# Altium PCB PCB1.PcbDoc
Units mm, origin at the board's own origin, x right, y up, seen from the top; angles counter-clockwise.
Board outline 40.39 x 68.48 mm, 2 copper layers (Top Layer, Bottom Layer); 30 components, 25 nets, 105 pads, 16 vias.
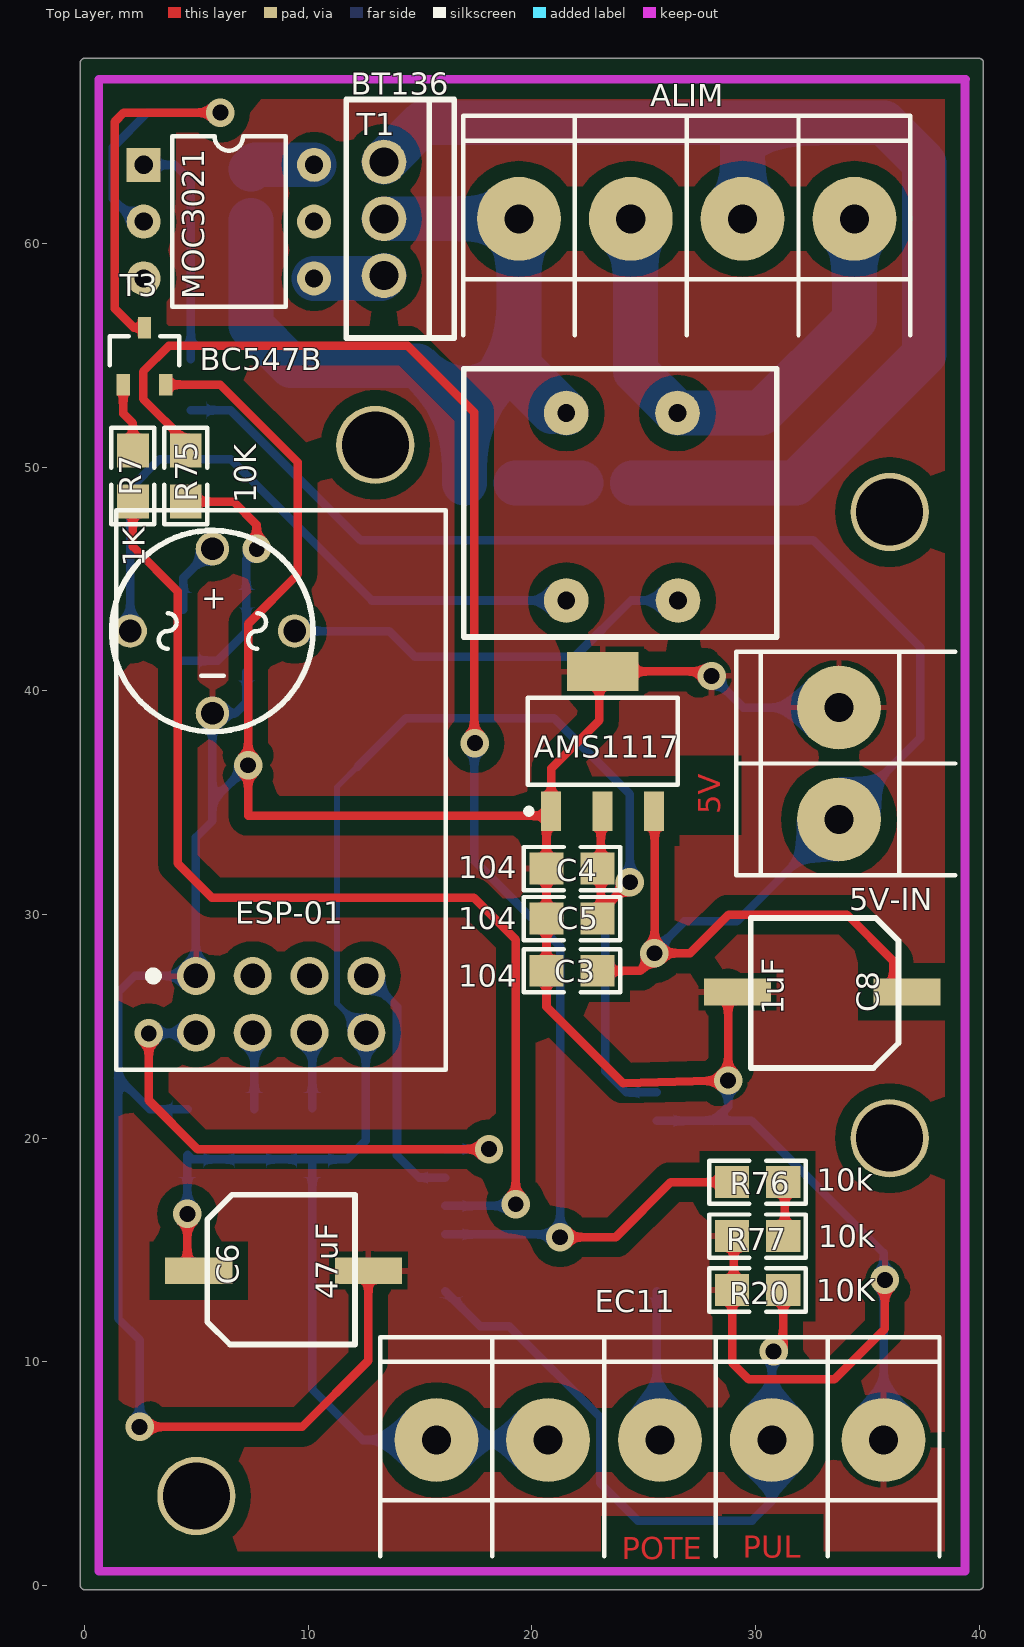
[diagram p0: Top Layer view]
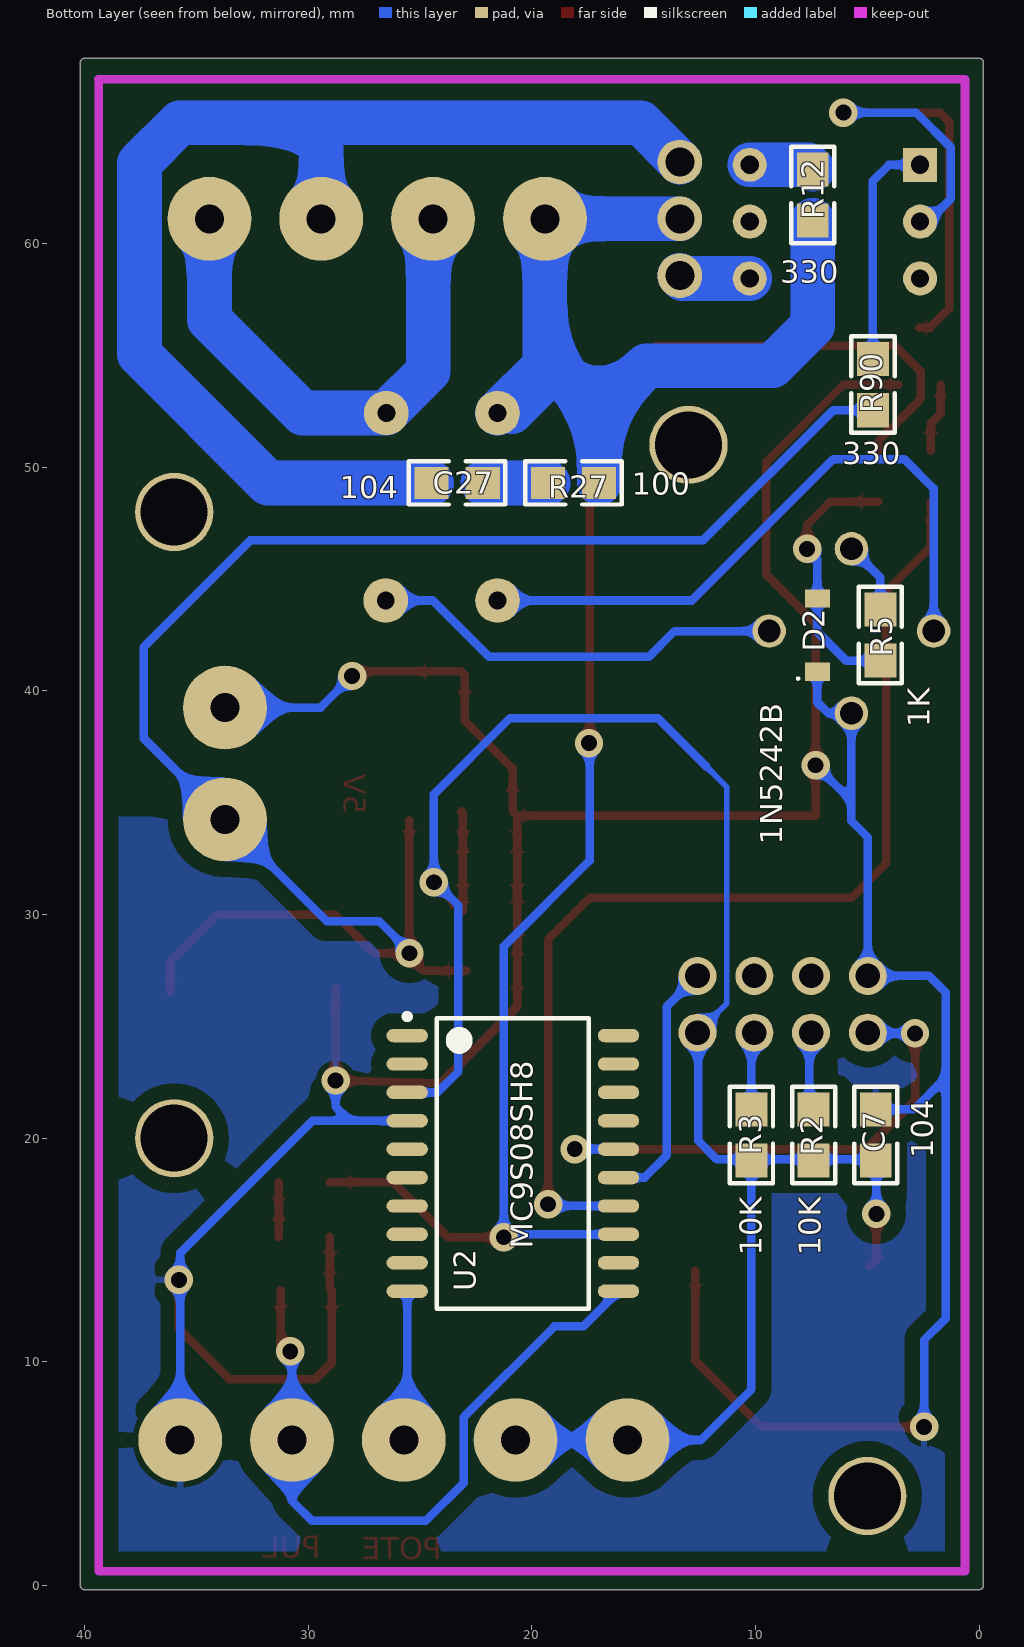
[diagram p1: Bottom Layer view, seen from below]

## Layer stack, top to bottom
Top Solder: solder mask 0.0102, Solder Resist, Dk 3.5
Top Layer: signal copper 0.0356
Dielectric 1: dielectric 0.32, FR-4, Dk 4.8
Bottom Layer: signal copper 0.0356
Bottom Solder: solder mask 0.0102, Solder Resist, Dk 3.5

## Board outline
-0.191,0 -0.191,68 cw(c0,68) -0.185,68.049 cw(c0,68.097) 0,68.288 40.005,68.288 cw(c40.005,68.097) 40.196,68.097 40.196,0 cw(c40.005,0) 40.005,-0.191 0,-0.191 cw(c0,0)

## Design rules (kind name [scope] priority, off if disabled: settings)
Clearance POLYGON [All vs InPolygon] p1: gap=0.7
Clearance [All] p2: gap=0.254
PolygonConnect [All] p1: connectstyle=Relief reliefconductorwidth=0.254 reliefentries=4 polygonreliefangle="90 Angle" airgapwidth=0.254
RoutingVias [All] p1: holewidth=0.711 width=1.27 viastyle="Through Hole" minholewidth=0.711 minwidth=1.27 maxholewidth=0.711 maxwidth=1.27
SolderMaskExpansion [All] p1: expansion=0.102
UnpouredPolygon [All] p1: allowunpoured=FALSE
Width [All] p1: maxlimit=2 minlimit=0.254 preferedwidth=0.381 minimp=50.000000 maximp=50.000000 favimp=50.000000
29 further rules are at their usual default settings.

## Classes and differential pairs
component class esq: C3 C4 C5 C6 C7 C8 C27 D2 R2 R3 R5 R7 R12 R20 R27 R75 R76 R77 R90 T1 T3 U2 ""

## Components (designator, comment, footprint, x,y, rotation, side; value= is the part's Value field where it differs from the comment)
* "TRAFO" "trafo chico" 23.952,51.41 r0 top
C3 "104" 0805 21.799,27.483 r180 top
C4 "104" 0805 21.799,29.82 r0 top
C5 "104" 0805 21.799,32.055 r180 top
C6 "47uF" CAP_SMD 8.788,14.072 r0 top
C7 "104" 0805 4.623,20.142 r90 bottom
C8 "1uF" CAP_SMD 33.096,26.543 r180 top
C27 "104" 0805 23.343,49.301 r0 bottom
D1 "" "PUENTE - W10M" 5.715,46.355 r0 top
D2 "1N5242B" Diodo 7.239,42.494 r90 bottom
J10 "5V-IN" BORNERA2 33.731,36.754 r0 top
J25 "EC11" BORNERA5 25.73,6.502 r270 top
J30 "ALIM" BORNERA4 26.924,61.112 r270 top
R2 "10K" 0805 7.404,20.142 r90 bottom
R3 "10K" 0805 10.185,20.142 r90 bottom
R5 "1K" 0805 4.42,42.494 r270 bottom
R7 "1K" 0805 2.159,49.606 r270 top
R12 "330" 0805 7.442,62.179 r90 bottom
R20 "10K" 0805 30.099,13.208 r0 top
R27 "100" 0805 18.136,49.301 r180 bottom
R75 "10K" 0805 4.521,49.606 r90 top
R76 "10k" 0805 30.099,18.034 r180 top
R77 "10k" 0805 30.099,15.621 r0 top
R90 "330" 0805 4.75,53.696 r90 bottom
T1 "BT136" BT136 13.386,61.112 r270 top
T3 "BC547B" SOT23 1.727,53.696 r0 top
U2 "MC9S08SH8" SH8 20.853,18.872 r180 bottom
U6 "ESP-01" ESP-01 4.978,24.714 r0 top
U27 "MOC3021" MOC3021 2.642,63.475 r0 top
U65 "AMS1117" AMS1117 23.165,37.744 r90 top

## Footprints (in the part's own frame and the unit in brackets; to place one, negate y for a bottom-side part, rotate by r counter-clockwise, add the part's x,y. Pads: shape width x height; smd on the part's side, far side on the other; paste and mask are expansions set on the pad)
0805 [mil] "Pasivo 0805"
  rect 60x56 smd: 1(-45,0) 2(45,0)
  silkscreen extent -85,-38 85,38, body extent -40,-25 39,25, height 15
AMS1117 [mm] "SOT223, 4-Leads, Body 6,50x7,00mm (avg), Pitch 2,30mm, IPC Medium Density"
  rect 1.75x0.9 smd: 1(-3.125,-2.3) 2(-3.125,2.3) 3(-3.125,0)
  rect 1.75x3.2 smd: 2(3.125,0)
  silkscreen extent -3.25,-3.35 1.95,3.42, body extent -3.48,-3.25 3.48,3.25, height 1.7
BORNERA2 [mm] "Bornera con Tornillos 5mm separaci�n"
  round 3.75 hole 1.3: 1(0,2.5) 2(0,-2.5)
  silkscreen extent -4.6,-5 5.2,5, body extent -3.76,-4.89 3.94,5.61, height 10
BORNERA4 [mm] "Bornera con Tornillos 5mm separaci�n"
  round 3.75 hole 1.3: 1(0,7.5) 2(0,2.5) 3(0,-2.5) 4(0,-7.5)
  silkscreen extent -4.6,-10 5.2,10, body extent -3.76,-9.89 3.94,10.61, height 10
BORNERA5 [mm] "Bornera con Tornillos 5mm separaci�n"
  round 3.75 hole 1.3: 1(0,10) 2(0,5) 3(0,0) 4(0,-5) 5(0,-10)
  silkscreen extent -4.6,-12.5 5.2,12.5, body extent -3.76,-12.39 3.94,13.11, height 10.05
BT136 [mm]
  round 2 hole 1.3: 1(-2.54,0) 2(0,0) 3(2.54,0)
  silkscreen extent -5.33,-1.69 5.34,3.14, body extent -5.21,-1.65 5.46,3.18, height 22.76
CAP_SMD [mm]
  rect 3x1.2 smd: 1(-3.683,0) 2(3.899,0)
  silkscreen extent -3.3,-3.3 3.3,3.4, body extent -3.9,-3.4 3.9,3.4, height 8.05
Diodo [mm] "SODFL, 2-Leads, Body 1,60x3,60mm, IPC Medium Density"
  rect 0.81x1.12 smd: 1(-1.635,0) 2(1.635,0)
  silkscreen extent -1.99,0.81 -1.89,0.91, body extent -1.4,-0.85 1.4,0.85, height 1.3
ESP-01 [mm]
  round 1.7 hole 1.1: 1(0,2.54) 2(2.54,2.54) 3(5.08,2.54) 4(7.62,2.54) 5(0,0) 6(2.54,0) 7(5.08,0) 8(7.62,0)
  silkscreen extent -3.56,-1.65 11.18,23.37, body extent -3.43,-1.52 11.07,23.28, height 14.88
MOC3021 [mil]
  rect 60x60 hole 32: 1(0,2)
  round 60 hole 32: 2(0,-98) 3(0,-198) 4(300,-198) 5(300,-98) 6(300,2)
  silkscreen extent 50,-248 250,52, body extent -5,-267 305,79, height 209
"PUENTE - W10M" [mm]
  round 1.5 hole 1.016: 1(0,0) 2(-3.677,-3.677) 3(0,-7.354) 4(3.677,-3.677)
  silkscreen extent -4.5,-8.18 4.5,0.82, body extent -6.58,-10.13 6.58,3.02, height 5.6
SH8 [mm] "SOP, 20-Leads, Body 12,80x7,50mm, Pitch 1,27mm, IPC Medium Density"
  oval 1.85x0.6 smd: 1(-4.725,5.715) 2(-4.725,4.445) 3(-4.725,3.175) 4(-4.725,1.905) 5(-4.725,0.635) 6(-4.725,-0.635) 7(-4.725,-1.905) 8(-4.725,-3.175) 9(-4.725,-4.445) 10(-4.725,-5.715) 11(4.725,-5.715) 12(4.725,-4.445) 13(4.725,-3.175) 14(4.725,-1.905) 15(4.725,-0.635) 16(4.725,0.635) 17(4.725,1.905) 18(4.725,3.175) 19(4.725,4.445) 20(4.725,5.715)
  silkscreen extent -4.85,-6.5 3.4,6.69, body extent -3.8,-6.5 3.8,6.5, height 2.65
SOT23 [mm]
  rect 0.6x0.95 smd: 1(0,0) 2(0.95,2.55) 3(1.9,0)
  silkscreen extent -0.6,0.87 2.5,2.18, body extent -0.53,-0.25 2.47,2.88, height 1
"trafo chico" [mm]
  round 2 hole 0.8: 1(-2.413,1.016) 5(2.559,1.016) 7(-2.413,-7.366) 9(2.587,-7.366)
  silkscreen extent -7,-9 7,3, body extent -7,-9 7,3, height 15.5

## Part data
C3 C4 C5 C7 C27: library part CAP, "cap"
C6 C8: library part CAPPOL, "Cap polarizado"
D1: library part PUENTE
D2: library part "DIODO SCHOTTKY", "Diodo"
J10: library part Bornera_2, "Bornera de 2 pines"
J25: library part "BORNERA 5"
J30: library part "BORNERA 4"
R2 R3 R5 R7 R12 R20 R27 R75 R76 R77 R90: library part RES, "Resistencia"
T3: library part "TRANSISTOR NPN"
U2: "Micro controlador"
U27: "OPTO-ACOPLADOR"

## Free pads (board coordinates)
  round 3.5 hole 3: ""(5,4) ""(13,51) ""(36,20) ""(36,48)

## Via types
v1: diameter 1.27, hole 0.711, Top Layer to Bottom Layer, 16 vias

## Nets (pads, with @x,y where several pads share a name; then routed paths per layer and width w, separated by ;. In a path a pad name is that pad's centre, name@x,y a point inside that pad or via, vN(x,y) a via of type N, cw(c..) or ccw(c..) an arc to the next point about the centre after c; other vN are vias at no path point)
3V3: C4.2 C5.1 C6.1 C7.1 J25.4 J25.5 R2.1 R3.1 U2.3 U6.8 U65.3 | length 89.3
  Top Layer w0.381: v1(4.597,16.612) 4.597,14.58 C6.1@4.89,14.287 ; U65.3 23.089,34.543 23.089,30.15 v1(24.384,31.445)
  Bottom Layer w0.254: 12.205,36.614 11.289,35.699 11.289,26.023 U6.8
  Bottom Layer w0.381: v1(4.597,16.612) 4.597,19.228 4.623,19.253 4.826,19.05 R3.1@10.185,19.05 ; 12.205,36.614 14.376,38.786 20.98,38.786 24.384,35.382 v1@24.384,31.496 ; U6.8 12.573,24.689 12.573,19.888 11.735,19.05 R3.1@10.185,19.05 ; J25.4 J25.5 12.446,6.502 10.185,8.763 R3.1@10.185,19.05 ; v1(24.384,31.445) v1@24.384,31.496 ; U2.3 24.232,22.047 23.292,22.987 23.292,30.404 v1@24.384,31.496
5V: C3.1 C8.1 J10.2 R90.1 U65.1 | length 79.4
  Top Layer w0.381: C3.1 24.849,27.483 v1@25.49,28.124 ; v1(25.476,28.27) v1@25.49,28.27 ; U65.1@25.49,34.213 v1@25.49,28.27 ; C8.1@36.17,26.543 36.17,27.915 34.087,29.997 28.804,29.997 27.076,28.27 v1@25.49,28.27
  Bottom Layer w0.381: R90.1 6.528,52.553 12.344,46.736 32.588,46.736 37.363,41.961 37.363,37.886 J10.2 29.17,29.693 26.822,29.693 25.476,28.346 v1(25.476,28.27)
CRUCE_CERO: D2.2 R5.2 R75.1 | length 11.9
  Top Layer w0.381: R75.1 6.655,48.463 7.696,47.422 v1(7.696,46.355)
  Bottom Layer w0.381: R5.2 5.944,41.351 7.239,42.647 D2.2 7.239,45.898 v1(7.696,46.355)
FASE: *.1 J30.4 R12.1 R27.2 T1.2 | length 40.1
  Bottom Layer w2: R12.1 7.442,56.337 9.239,54.541 14.877,54.541 16.993,52.426 ; T1.2 J30.4 19.424,54.857 ; R27.2 16.993,52.426 ; 19.424,53.975 *.1@20.904,52.495 ; *.1 19.424,54.541 19.424,54.857 ; 16.993,52.426 19.424,54.857
GND: C3.2 C4.1 C5.2 C6.2 C7.2 C8.2 D1.3 D2.1 J10.1 J25.1 R20.1 R77.1 T3.3 U2.4 U6.1 U65.2 | length 177.3
  Top Layer w0.381: v1(2.464,7.087) 9.728,7.087 12.688,10.046 C6.2 ; T3.3 6.062,53.696 9.525,50.232 9.525,45.212 7.315,43.002 7.315,34.417 20.662,34.417 20.656,34.41 C5.2 C4.1 C3.2 20.656,25.877 24.079,22.454 v1(28.778,22.581) C8.2@28.778,26.695 ; U65.2@20.803,34.557 20.865,34.619 20.865,36.537 23.012,38.684 23.012,40.717 23.165,40.869 27.838,40.869 v1(28.042,40.665) ; R77.1@29.032,15.596 29.032,13.284 R20.1 28.956,9.957 29.693,9.22 33.528,9.22 35.789,11.481 v1(35.789,13.665)
  Bottom Layer w0.381: v1(2.464,7.087) 2.464,10.973 1.499,11.938 1.499,22.708 ; C7.2 2.921,21.285 1.499,22.708 ; D2.1 7.239,39.497 6.743,39.001 D1.3 5.715,35.077 ; v1(7.315,36.678) 5.715,35.077 ; U2.4 28.143,20.777 ; v1(28.042,40.665) 29.453,39.254 J10.1 ; v1(28.778,22.581) 28.778,21.412 28.143,20.777 ; J25.1 35.73,14.867 29.82,20.777 28.143,20.777 ; 1.499,22.708 1.499,26.518 2.235,27.254 U6.1 4.978,33.452 5.715,34.188 5.715,35.077
LAMPARA: R7.2 U2.14 | length 48.4
  Top Layer w0.381: R7.2 2.159,46.457 4.166,44.45 4.166,32.283 5.69,30.759 17.399,30.759 19.279,28.88 v1(19.279,17.043)
  Bottom Layer w0.381: U2.14 v1@19.202,16.967
Net*_7: *.7 D1.2 | length 29
  Bottom Layer w0.381: D1.2 2.038,49.053 3.353,50.368 6.528,50.368 12.852,44.044 *.7
Net*_9: *.9 D1.4 | length 18.7
  Bottom Layer w0.381: D1.4 13.62,42.678 14.77,41.529 21.92,41.529 24.435,44.044 *.9
NetC27_1: C27.1 R27.1 | length 2.9
  Bottom Layer w2: R27.1 C27.1
NetC27_2: C27.2 J30.2 T1.1 | length 54.3
  Bottom Layer w2: T1.1 15.138,65.405 30.429,65.405 ; C27.2 31.801,49.301 37.553,55.054 37.553,63.602 35.75,65.405 30.429,65.405 ; J30.2 29.424,64.4 30.429,65.405
NetD1_1: D1.1 R5.1 | length 3.3
  Bottom Layer w0.381: R5.1 4.42,45.06 D1.1
NetJ25_2: J25.2 R20.2 U2.11 | length 30.6
  Top Layer w0.381: v1(30.81,10.465) 31.242,10.897 R20.2
  Bottom Layer w0.381: U2.11 17.703,11.582 18.993,11.582 23.05,7.526 23.05,4.586 24.74,2.896 29.845,2.896 30.73,3.781 J25.2 30.73,10.385 v1(30.81,10.465)
NetJ25_3: J25.3 U2.10 | length 6.7
  Bottom Layer w0.381: J25.3@25.578,8.07 U2.10 ; J25.3 J25.3@25.73,8.07
NetR2_2: R2.2 U6.6 | length 3.5
  Bottom Layer w0.381: U6.6 7.595,24.638 R2.2@7.595,21.285
NetR3_2: R3.2 U6.7 | length 3.4
  Bottom Layer w0.381: U6.7 10.185,24.587 R3.2@10.185,21.336
NetR7_1: R7.1 T3.1 | length 3.1
  Top Layer w0.381: T3.1 1.727,52.4 2.159,51.968 R7.1
NetR12_2: R12.2 U27.6 | length 2.9
  Bottom Layer w2: R12.2 7.645,63.525 U27.6
NetR75_2: R75.2 R76.2 U2.13 | length 73.5
  Top Layer w0.381: R75.2 4.521,51.156 2.616,53.061 2.616,54.28 3.772,55.436 14.44,55.436 17.424,52.451 17.424,37.694 v1(17.45,37.668) ; v1(21.26,15.57) 23.749,15.57 26.213,18.034 R76.2@29.032,18.034
  Bottom Layer w0.381: U2.13 v1@21.59,15.697 ; v1@17.424,37.605 17.424,32.41 21.26,28.575 21.26,15.9 v1@21.057,15.697
NetR76_1: R76.1 R77.2 | length 2.4
  Top Layer w0.381: R77.2@31.318,15.596 R76.1@31.318,18.034
NetR90_2: R90.2 U27.1 | length 10.4
  Bottom Layer w0.381: U27.1 4.039,63.525 4.75,62.814 R90.2
NetT1_3: T1.3 U27.4 | length 3.2
  Bottom Layer w2: U27.4 13.259,58.445 T1.3
NetT3_2: T3.2 U27.2 | length 24.5
  Top Layer w0.381: T3.2 2.2,56.246 1.346,57.099 1.346,65.456 1.753,65.862 v1(6.071,65.862)
  Bottom Layer w0.381: U27.2 2.286,60.985 1.27,62.001 1.27,64.313 2.819,65.862 v1(6.071,65.862)
NEUTRO: *.5 J30.1 J30.3 | length 23.7
  Bottom Layer w2: J30.3 24.638,60.898 24.638,54.299 *.5 30.251,52.426 34.424,56.598 J30.1
RXD: U2.15 U6.4 | length 11.2
  Bottom Layer w0.381: U6.4 13.97,25.883 13.97,19.228 14.961,18.237 U2.15
TXD: U2.16 U6.5 | length 23.3
  Top Layer w0.381: v1(2.87,24.689) 2.87,21.692 5.055,19.507 v1(18.085,19.507)
  Bottom Layer w0.381: v1(2.87,24.689) 4.801,24.689 4.877,24.613 U6.5 ; U2.16 v1(18.085,19.507)
pads on no net: U2.1 U2.2 U2.5 U2.6 U2.7 U2.8 U2.9 U2.12 U2.17 U2.18 U2.19 U2.20 U6.2 U6.3 U27.3 U27.5

## Polygon pours and split planes (outlines as drawn)
GND on Top Layer "POLYGON" (solid, remove dead copper, pour order 2): -8.179,72.466 -5.182,69.469 45.339,69.469 45.339,-1.372 43.104,-3.607 42.113,-2.616 -11.151,-2.616
GND on Bottom Layer "POLYGON" (solid, remove dead copper, pour order 4): -4.115,46.507 -4.115,35.433 -4.826,34.722 -4.47,34.366 17.882,34.366 44.298,34.366 45.288,33.376 41.834,29.921 41.834,-1.829 -1.702,-1.829 -2.794,-0.737

## Keep-outs
Keep-Out Layer:
  lines w0.381: 0.635,67.361 0.635,0.635 39.37,0.635 39.37,67.361 ; 0.66,67.361 39.395,67.361

## Other copper
Top Layer:
  text "5V" at 28.423,34.493 h1 r90
  text "PUL" at 29.439,1.245 h1
  text "POTE" at 24.028,1.168 h1

## Silkscreen, mask and mechanical layers (free items; w line width, h text height)
Mechanical 15:
  lines w0.381: 0,68 0,0 40.005,0 40.005,68.097 0,68.097

## Text inside footprints (layer, text, board x,y; h text height)
D1: Top Overlay "+" at 5.215,43.678 h1